# EAGLE board sensor_module_v4 (EAGLE 6.5.0)
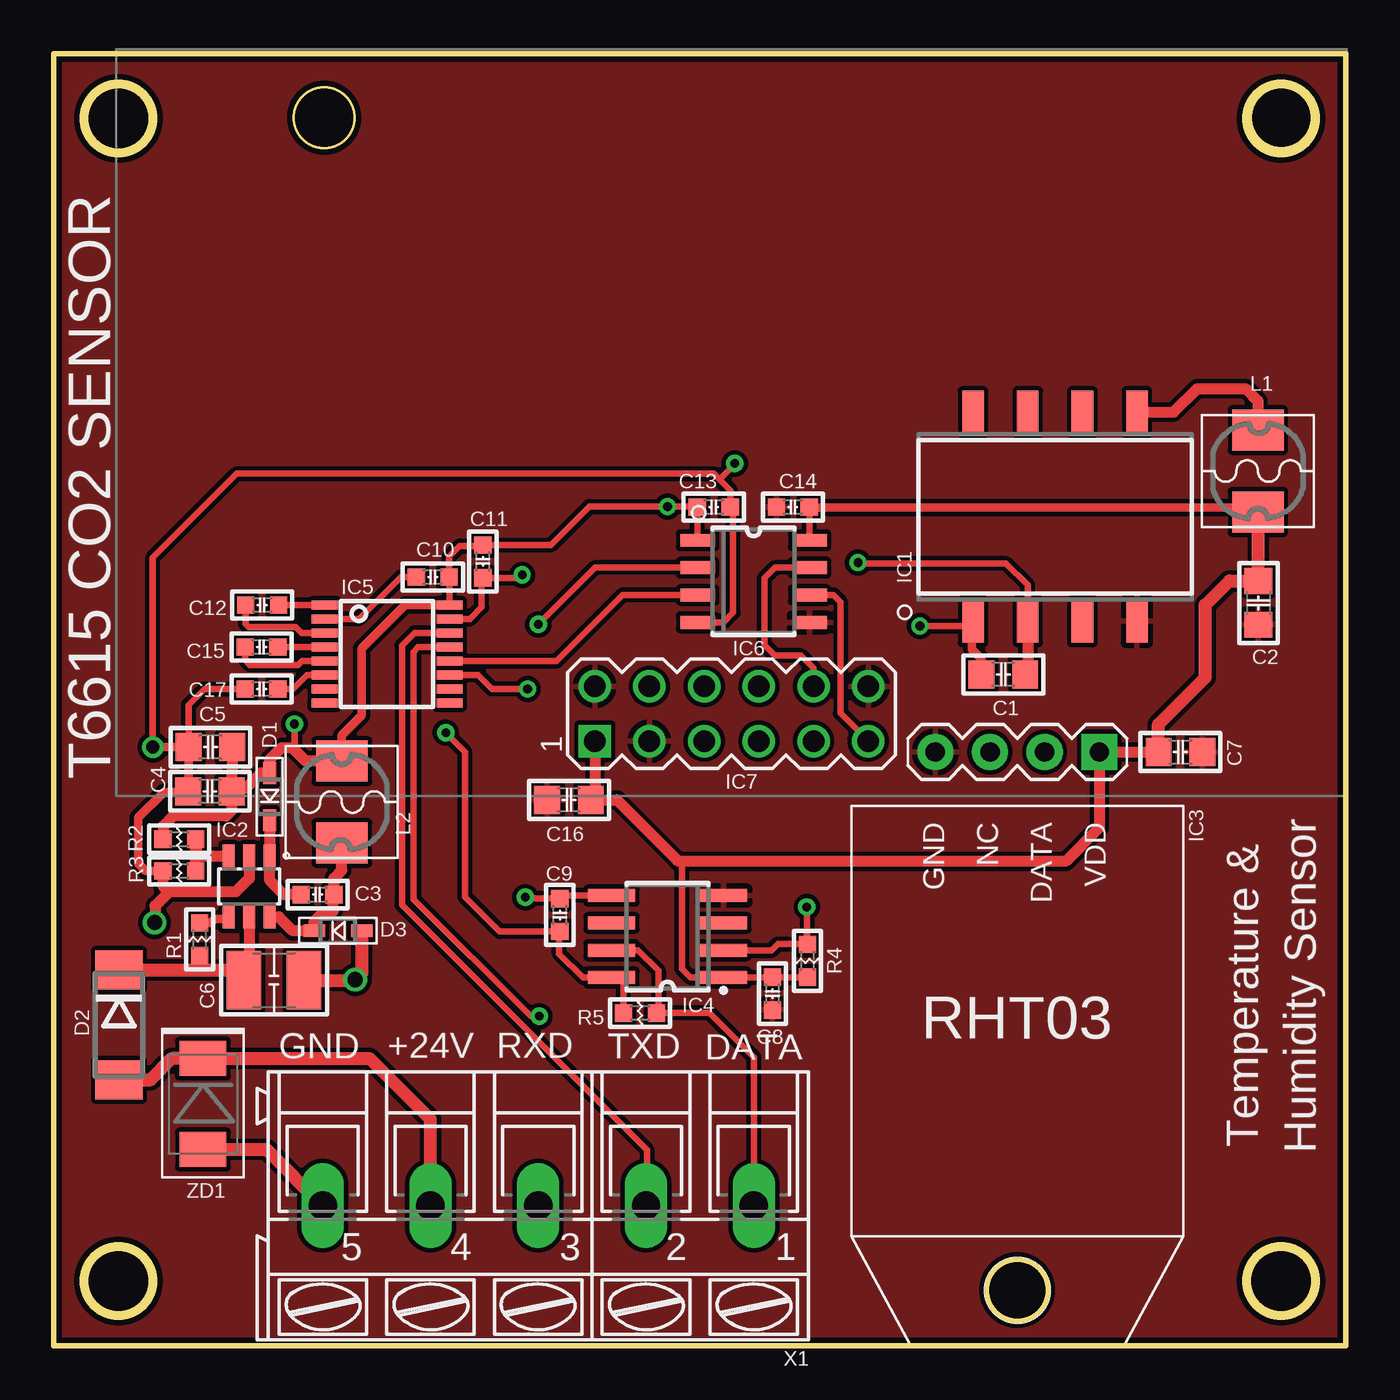
[diagram p0: board, top side]
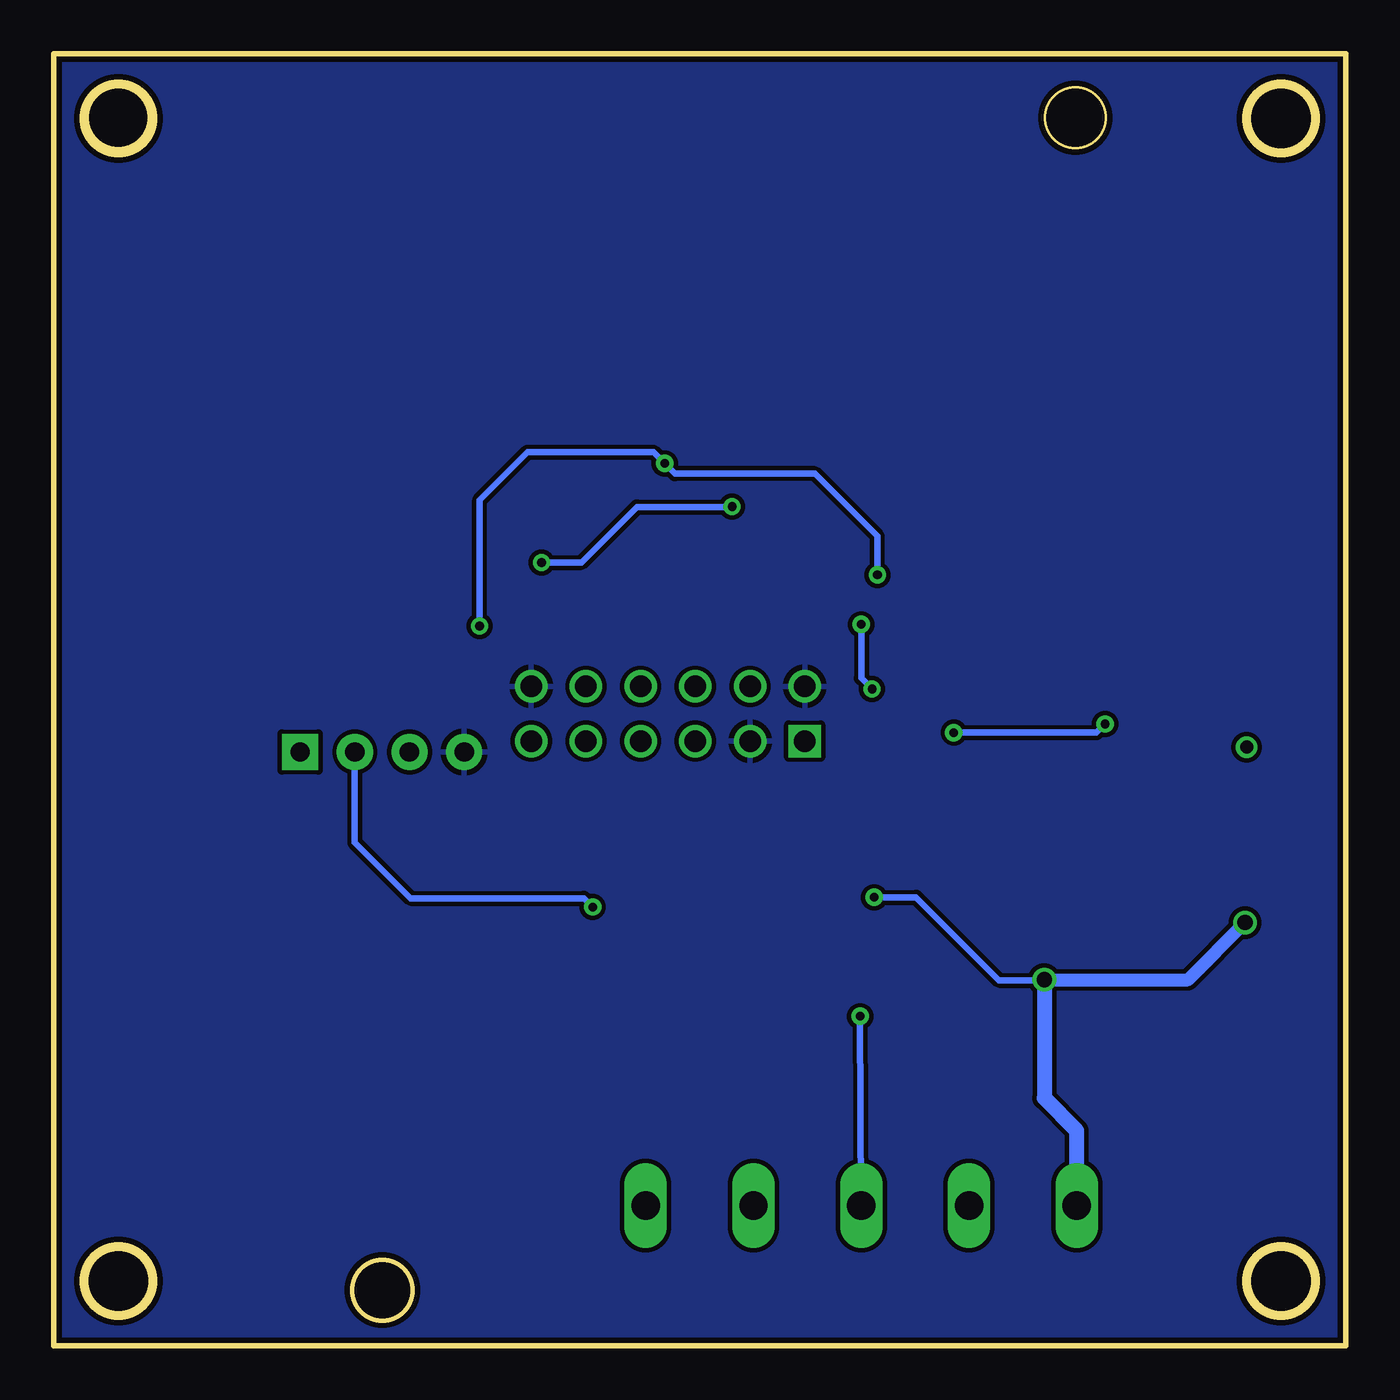
[diagram p1: board, bottom side, seen from below]

Size 60 x 60 mm. Coordinates in mm from the lower left corner, seen from the top.
Outline: 0,0 60,0 60,60 0,60 0,0
Outline: circle at 3,3 radius 1.6
Outline: circle at 57,3 radius 1.6
Outline: circle at 57,57 radius 1.6
Outline: circle at 3,57 radius 1.6
Outline: circle at 44.75,2.58 radius 1.4
Copper layers (1*16): Top 0.035mm / dielectric 1.5mm / Bottom 0.035mm
Design rules "default": minimum track width 0.2mm, minimum drill 0.3mm, track to track 0.2mm, track to pad 0.2mm, pad to pad 0.2mm, via to via 0.2mm, smd to smd 0.2mm, copper to edge 10mil, drill to drill 0.2mm, minimum pad ring 10mil, minimum via ring 8mil, stop-mask expansion 4mil, vias tented up to drill 0mil, thermal gap 10mil
Net classes: 0 default: clearance 0.152 mm; 1 +5V: width 0.2 mm, clearance 0.152 mm; 2 GND: width 0.3 mm, drill 0.203 mm, clearance 0.203 mm

## Footprints (pad centres in the part's own frame; a part is rotated, then mirrored left to right if it is on the bottom)
C0805 = smd 1.2 x 1.3: 1 -1.016,0; 2 1.016,0
C0603 = smd 0.8 x 0.8: 1 -0.762,0; 2 0.762,0
C3225 = smd 1.6 x 2.7: 1 -1.397,0; 2 1.397,0
SOD323 = smd 1 x 0.6: A 1.1,0; C -1.1,0
DO214AA = smd 1.8 x 2.2: A 2.55,0; C -2.55,0
NTE0505MC = smd 1 x 2: 1 -3.81,-4.85; 3 -1.27,-4.85; 5 1.27,-4.85; 7 3.81,-4.85; 8 3.81,4.85; 10 1.27,4.85; 12 -1.27,4.85; 14 -3.81,4.85
SOT23-6L = smd 0.55 x 1.1: 1 -0.95,-1.4; 2 0,-1.4; 3 0.95,-1.4; 4 0.95,1.4; 5 0,1.4; 6 -0.95,1.4
RHT03-FRONT = drill 0.9 pad 1.676 square: 1 -3.81,0 | drill 0.9 pad 1.676: 2 -1.27,0; 3 1.27,0; 4 3.81,0
SO08 = smd 0.6 x 2.2: 1 -1.905,-2.6; 2 -0.635,-2.6; 3 0.635,-2.6; 4 1.905,-2.6; 5 1.905,2.6; 6 0.635,2.6; 7 -0.635,2.6; 8 -1.905,2.6
PW_R-PDSO-G16 = smd 0.4 x 1.2: 1 -2.275,-2.9; 2 -1.625,-2.9; 3 -0.975,-2.9; 4 -0.325,-2.9; 5 0.325,-2.9; 6 0.975,-2.9; 7 1.625,-2.9; 8 2.275,-2.9; 9 2.275,2.9; 10 1.625,2.9; 11 0.975,2.9; 12 0.325,2.9; 13 -0.325,2.9; 14 -0.975,2.9; 15 -1.625,2.9; 16 -2.275,2.9
SO8 = smd 0.6 x 1.6: 1 -1.905,-2.6; 2 -0.635,-2.6; 3 0.635,-2.6; 4 1.905,-2.6; 5 1.905,2.6; 6 0.635,2.6; 7 -0.635,2.6; 8 -1.905,2.6
T63172 = drill 1 square: 1 -6.35,-1.27 | drill 1: 2 -6.35,1.27; 3 -3.81,-1.27; 4 -3.81,1.27; 5 -1.27,-1.27; 6 -1.27,1.27; 7 1.27,-1.27; 8 1.27,1.27; 9 3.81,-1.27; 10 3.81,1.27; 11 6.35,-1.27; 12 6.35,1.27
L5845 = smd 1.9 x 2.4: 1 -1.9,0; 2 1.9,0
R0603 = smd 0.8 x 0.8: 1 -0.762,0; 2 0.762,0
AK300/5 = drill 1.321 long: 1 -10.008,0; 2 -5.004,0; 3 0,0; 4 5.004,0; 5 10.008,0
SMB = smd 1.62 x 2.18: A 2.11,0; C -2.11,0

## Placement (x,y rotation side)
C1  10uF  [C0805]  44.1,31.18 180 top
C2  4.7uF  [C0805]  55.95,34.5 270 top
C3  0.1uF  [C0603]  12.25,20.95 0 top
C4  10uF  [C0805]  7.25,25.75 180 top
C5  10uF  [C0805]  7.28,27.8 180 top
C6  10uF/35V  [C3225]  10.22,16.98 0 top
C7  10uF  [C0805]  52.33,27.57 0 top
C8  0.1uF  [C0603]  33.38,16.35 270 top
C9  0.1uF  [C0603]  23.5,20 270 top
C10  0.1uF  [C0603]  17.6,35.7 180 top
C11  0.1uF  [C0603]  19.93,36.42 90 top
C12  0.1uF  [C0603]  9.68,34.4 0 top
C13  0.1uF  [C0603]  30.65,38.95 0 top
C14  0.1uF  [C0603]  34.33,38.95 0 top
C15  0.1uF  [C0603]  9.65,32.45 0 top
C16  10uF  [C0805]  23.93,25.35 180 top
C17  0.1uF  [C0603]  9.65,30.5 0 top
D1  1N4148WS  [SOD323]  10.03,25.5 90 top
D2  SS34  [DO214AA]  3.02,14.9 270 top
D3  B5819WS  [SOD323]  13.2,19.27 0 top
IC1  NTE0505MC  [NTE0505MC]  46.5,38.5 0 top
IC2  MCP16301  [SOT23-6L]  9.07,21.32 180 top
IC3  RHT03  [RHT03-FRONT]  44.75,27.57 180 top
IC4  IOS1540  [SO08]  28.5,19 90 top
IC5  MAX3232CPW  [PW_R-PDSO-G16]  15.47,32.12 270 top
IC6  ISO7221  [SO8]  32.5,35.5 270 top
IC7  T6615  [T63172]  31.48,29.35 0 top
L1  47uH  [L5845]  55.92,40.62 90 top
L2  22uH  [L5845]  13.38,25.25 270 top
R1  10M  [R0603]  6.78,18.88 90 top
R2  52.3kF  [R0603]  5.83,23.52 180 top
R3  10kF  [R0603]  5.83,22.05 0 top
R4  1.5K  [R0603]  35,17.88 270 top
R5  1.5K  [R0603]  27.23,15.45 180 top
X1  [AK300/5]  22.5,6.5 180 top
ZD1  SM6T33CAY  [SMB]  6.92,11.22 270 top

## Library data of the parts
C1-C17 D1-D3 IC1-IC7 L1 L2 R1-R5 = cona_lib
X1 = con-ptr500; OC_FARNELL: unknown; OC_NEWARK: unknown
ZD1 = GRU-EURO6

## Nets
+5V: C1.1 C4.1 C5.1 C9.2 C10.1 C11.2 C13.1 D1.A IC1.3 IC4.8 IC5.16 IC6.1 L2.1 R2.2 R5.2
+5V/1: C2.1 C7.1 C8.1 C14.2 C16.1 IC3.1 IC4.1 IC6.8 IC7.1 L1.1 R4.2
+24V: D2.A X1.4 ZD1.C
GND [GND]: C2.2 C7.2 C8.2 C14.1 C16.2 IC1.7 IC3.4 IC4.4 IC6.5 IC7.2 IC7.3 IC7.12
GNDINT [GND]: C1.2 C4.2 C5.2 C6.2 C9.1 C11.1 C13.2 C17.1 D3.A IC1.1 IC2.2 IC4.5 IC5.15 IC6.4 R3.1 X1.5 ZD1.A
HUMI&TEMP: IC4.7 R5.1 X1.1
N$1: IC6.6 IC7.11
N$2: IC6.7 IC7.10
N$4: C6.1 D2.C IC2.5 R1.1
N$9: C15.1 IC5.5
N$13: C15.2 IC5.4
N$14: C17.2 IC5.6
N$15: C10.2 IC5.2
N$16: C12.2 IC5.1
N$17: C12.1 IC5.3
N$30: IC1.8 L1.2
N$31: C3.2 D3.C IC2.6 L2.2
N$32: IC2.3 R2.1 R3.2
N$33: C3.1 D1.C IC2.1
N$34: IC2.4 R1.2
RHT03: IC3.2 IC4.2 R4.1
RIN: IC5.12 IC6.3
RXD: IC5.13 X1.3
TOUT: IC5.11 IC6.2
TXD: IC5.14 X1.2

## Tracks (layer width: path | path; a pad name or v marks a point on that pad's centre or on a via)
+5V  (via drill 0.4)
  Top 0.3: IC6.1 29.9,38.94 C13.1 29.86,38.98 v28.5,38.98 24.88,38.98 23.09,37.19 C11.2 19.89,37.15 18.85,37.15 18.36,36.66 C10.1 18.38,35.69 IC5.16 | IC1.3 45.23,35.32 44.23,36.33 37.4,36.33 v37.35,36.38 | R5.2 26.46,16.96 26.5,17 26,17 IC4.8 24.58,17.09 23.48,18.2 23.48,19.21 C9.2 20.71,19.24 19.1,20.85 19.1,27.57 v18.2,28.48 | v11.18,28.88 11.18,27.88 11.07,27.77
  Top 0.4: IC5.16 16.32,34.4 14.3,32.38 14.3,29.27 13.38,28.35 L2.1 13.6,27.48
  Top 0.5: IC1.3 45.23,31.29 C1.1 | 10,26.57 D1.A | C5.1 C4.1 | D1.A 9.62,26.6 8.93,25.9 8.42,25.9 C4.1 | C4.1 8.27,24.87 8,24.6 5.55,24.6 5.08,24.12 5.08,23.54 R2.2 | D1.A 10.03,27.23 10.57,27.77 11.07,27.77 11.7,27.15 L2.1
  Bottom 0.3: v37.35,36.38 35.5,36.38 32.92,38.95 28.52,38.95 v28.5,38.98 | v18.2,28.48 11.57,28.48 v11.18,28.88
+5V/1
  Top 0.3: IC6.8 35.1,38.94 C14.2 | R4.2 C8.1 33.36,17.09 IC4.1 29.58,17.09 29.18,17.5 29.18,22.32 28.91,22.59
  Top 0.4: 35.1,38.94 55.92,38.94 L1.1
  Top 0.5: C7.1 IC3.1 48.56,24.06 47,22.5 29,22.5 28.91,22.59 26.15,25.35 C16.1 25.12,25.53 IC7.1
  Top 0.6: C7.1 51.31,28.86 53.48,31.02 53.48,34.4 54.6,35.52 C2.1 55.95,38.23 L1.1
+24V
  Top 0.6: X1.4 17.5,10.5 14.66,13.34 ZD1.C 5.49,13.34 4.5,12.35 D2.A
GND
  Top 0.5: 40.95,27.59 IC3.4
  pour Bottom: 0,60 0,0 60,0 60,60
  pour Top: 0,60 0,0 60,0 60,60
GNDINT  (via drill 0.4, 0.6, 0.7)
  Top 0.3: 6.26,25.77 C4.2 | C5.2 6.26,29.76 7,30.5 C17.1 | 5.08,21.94 R3.1 | 43.03,31.12 C1.2 | v40.23,33.42 42.47,33.42 IC1.1 | IC6.4 31.09,33.59 31.55,34.05 31.55,38.81 C13.2 31.43,38.96 31.43,39.73 30.91,40.24 | v4.6,27.8 4.6,36.6 8.5,40.5 30.65,40.5 30.91,40.24 | v31.62,40.98 31.62,40.95 30.91,40.24 | IC5.15 19.32,33.75 19.88,34.3 19.88,35.61 C11.1 21.61,35.66 v21.75,35.8 | IC4.5 23.64,20.91 C9.1 21.96,20.76 v21.9,20.82
  Top 0.4: C1.2 43.08,31.89 42.65,32.33 42.65,33.61 IC1.1 | R3.1 4.28,22.05 3.92,22.4 3.92,24.52 5.12,25.73 6.21,25.73 C4.2 | 6.26,25.77 C5.2 v4.6,27.8 4.58,27.82
  Top 0.5: IC2.2 9.07,21.7 8.45,21.07 5.35,21.07 | 5.35,21.07 4.7,20.43 4.7,19.68 v4.67,19.65 | R3.1 5.06,21.36 5.35,21.07
  Top 0.6: C6.2 13.97,16.98 v14,17 14.3,17.3 D3.A | ZD1.A 9.88,9.12 X1.5
  Bottom 0.3: v40.23,33.42 40.23,39.27 38,41.5 32.15,41.5 v31.62,40.98 31.15,40.5 24.65,40.5 21.75,37.6 v21.75,35.8 | v21.9,20.82 19.95,20.82 16.1,16.98 14.03,16.98 v14,17
  Bottom 0.6: v14,17 7.33,17 v4.67,19.65
  Bottom 0.7: v14,17 14,11.5 12.5,10 X1.5
HUMI&TEMP
  Top 0.3: IC4.7 27.14,18.36 28.07,17.43 28.07,15.54 R5.1 30.45,15.45 32.51,13.39 X1.1
N$1
  Top 0.3: IC6.6 36.21,34.87 36.52,34.55 36.52,29.38 IC7.11
N$2
  Top 0.3: IC7.10 35.28,31.46 34.7,32.05 33.5,32.05 33,32.55 33,35.65 33.48,36.13 IC6.7
N$4
  Top 0.5: IC2.5 9.07,17.5 9.07,17.11 C6.1
  Top 0.6: D2.C 7,17.45 | 7,17.45 9.03,17.45 9.07,17.5 | R1.1 6.78,17.68 7,17.45
N$9
  Top 0.3: IC5.5 11.53,31.8 11.35,31.62 9.1,31.62 8.89,31.84 C15.1
N$13
  Top 0.3: IC5.4 C15.2
N$14
  Top 0.3: IC5.6 11.78,31.15 11.12,30.5 C17.2
N$15
  Top 0.3: C10.2 16.12,35.7 14.18,33.75 IC5.2
N$16
  Top 0.3: IC5.1 C12.2
N$17
  Top 0.3: IC5.3 11.5,33.1 11.22,33.38 9.05,33.38 8.9,33.52 8.9,34.39 C12.1
N$30
  Top 0.5: IC1.8 52,43.35 53.1,44.45 55.35,44.45 55.92,43.88 L1.2
N$31
  Top 0.5: IC2.6 10.45,19.93 11.1,19.27 D3.C 12.1,19.7 12.4,20 12.78,20 12.97,20.2 12.97,20.91 C3.2 13.01,21.71 13.38,22.07 L2.2
N$32
  Top 0.5: IC2.3 6.8,22.73 6.62,22.9 6.62,23.49 R2.1 R3.2
N$33
  Top 0.5: C3.1 10.68,20.95 10.03,21.6 IC2.1 D1.C
N$34
  Top 0.4: R1.2 7.29,19.64 7.47,19.82 8.03,19.82 IC2.4
RHT03  (via drill 0.4)
  Top 0.3: IC4.2 33.34,18.36 33.62,18.65 34.99,18.65 R4.1 34.98,18.66 v34.98,20.38
  Bottom 0.3: IC3.2 46.02,23.37 43.42,20.77 35.38,20.77 v34.98,20.38
RIN
  Top 0.3: IC5.12 23.35,31.8 26.02,34.48 26.3,34.75 26.41,34.87 IC6.3
RXD  (via drill 0.4)
  Top 0.3: IC5.13 16.93,32.45 16.7,32.23 16.7,20.73 22.15,15.32 v22.55,15.3
  Bottom 0.3: v22.55,15.3 22.52,6.53 X1.3
TOUT  (via drill 0.4)
  Top 0.3: IC6.2 25.14,36.13 v22.5,33.5 | v22,30.5 20.35,30.5 19.7,31.15 IC5.11
  Bottom 0.3: v22.5,33.5 22.5,31 v22,30.5
TXD
  Top 0.3: X1.2 27.55,6.55 27.55,9.1 16.18,20.48 16.18,32.52 16.75,33.1 IC5.14

## Text on the board
_tplace: 1 | T6615 CO2 SENSOR | GND | NC | DATA | VDD | RHT03 | GND | +24V | RXD | TXD | DATA | Temperature & | Humidity Sensor